# Altium PCB esp32-s3_poly.PcbDoc
Units mil, origin at the board's own origin, x right, y up, seen from the top; angles counter-clockwise.
Board outline 1000 x 2460.63 mil, 4 copper layers (Top Layer, Layer 1, Layer 2, Bottom Layer), stack 23.756 mil thick; 54 components, 58 nets, 223 pads, 233 vias.
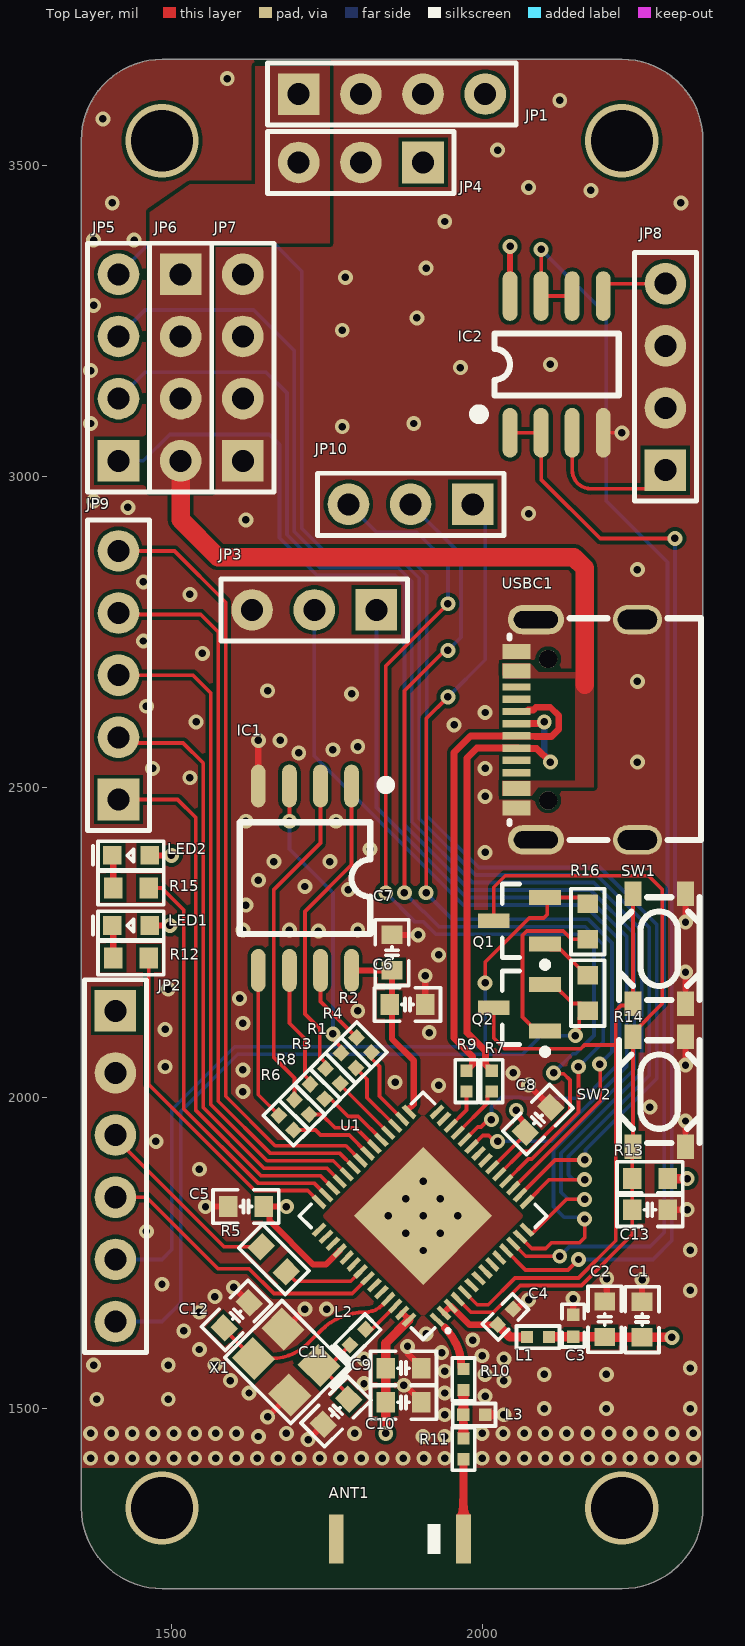
[diagram p0: Top Layer view]
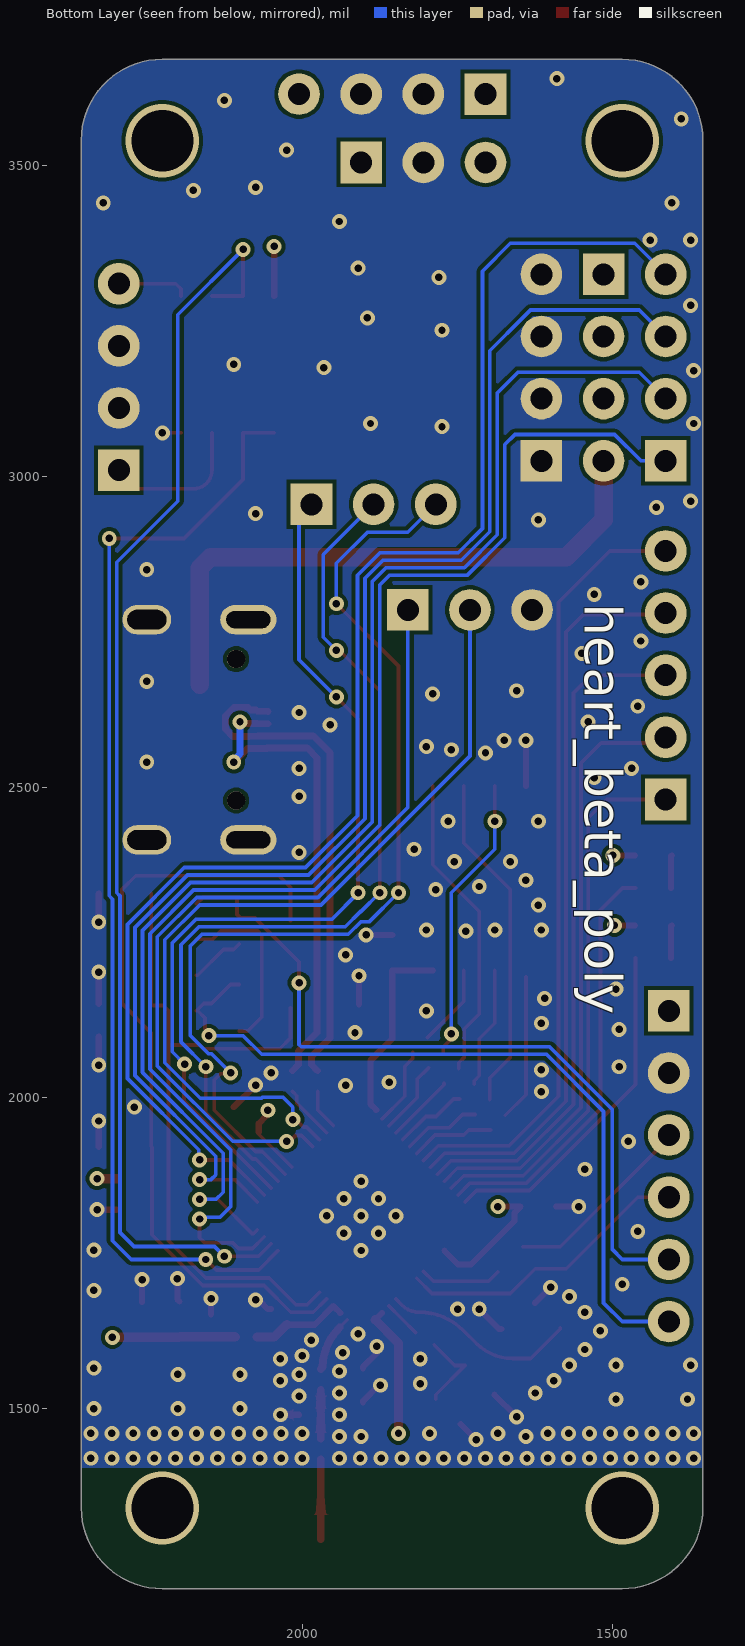
[diagram p1: Bottom Layer view, seen from below]
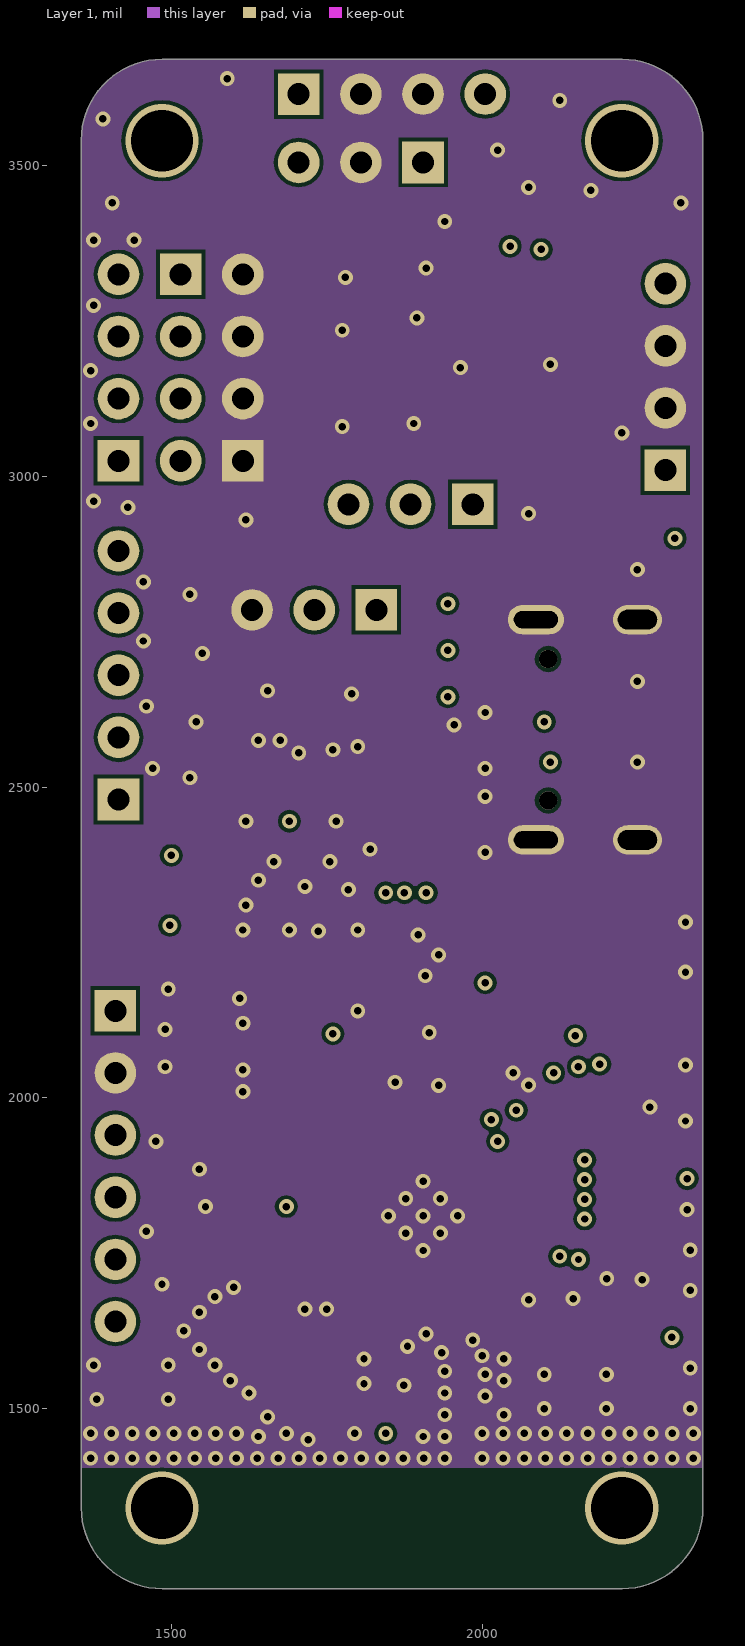
[diagram p2: Layer 1]
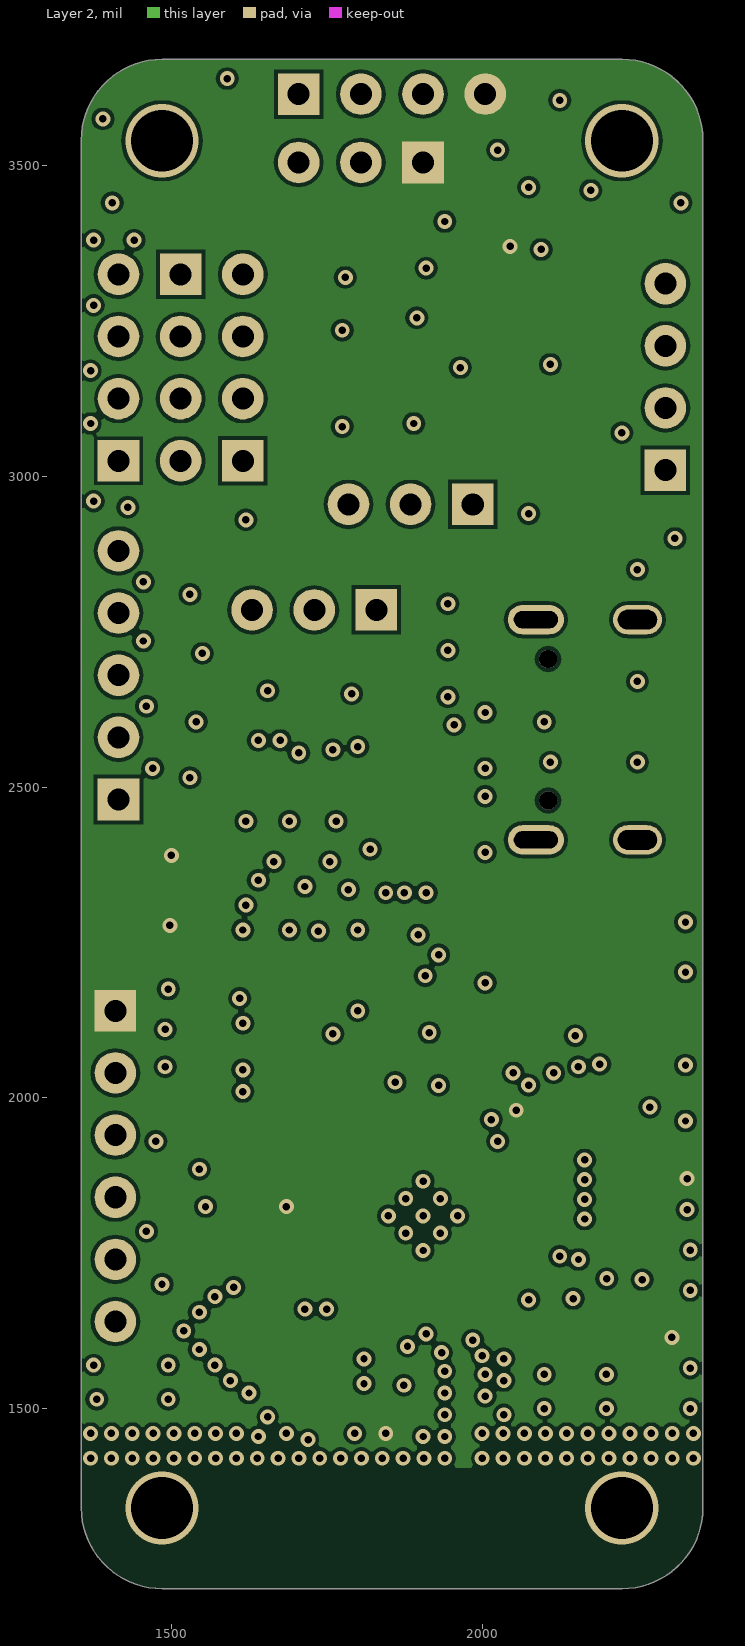
[diagram p3: Layer 2]

## Layer stack, top to bottom
Top Solder: solder mask 0.4, Solder Resist, Dk 3.5
Top Layer: signal copper 1.4
Dielectric 2: prepreg 2.8, PP-006, Dk 4.1
Layer 1: signal copper 1.378
Dielectric 1: dielectric 12.6, FR-4, Dk 4.8
Layer 2: signal copper 1.378
Dielectric 3: prepreg 2.8, PP-006, Dk 4.1
Bottom Layer: signal copper 1.4
Bottom Solder: solder mask 0.4, Solder Resist, Dk 3.5

## Board outline
1355.25,1340.17 ccw(c1485.17,1340.17) 1485.17,1210.25 2225.33,1210.25 ccw(c2225.33,1340.17) 2355.25,1340.17 2355.25,3540.96 ccw(c2225.33,3540.96) 2225.33,3670.88 1485.17,3670.88 ccw(c1485.17,3540.96) 1355.25,3540.96

## Design rules (kind name [scope] priority, off if disabled: settings)
AcuteAngle [All] p1: minimum=4.50000000000000E+0001 checktracksonly=FALSE
BoardOutlineClearance [All] p1: gap=0 ignorepadtopadclearanceinfootprint=FALSE
Clearance [All] p1: gap=6 ignorepadtopadclearanceinfootprint=TRUE
DiffPairsRouting [All] p1: maxlimit=10 minlimit=6 mostfreqgap=10 toplayer_minwidth=6 toplayer_maxwidth=15 toplayer_prefwidth=10 midlayer1_minwidth=6 midlayer1_maxwidth=15 midlayer1_prefwidth=10 midlayer2_minwidth=6 midlayer2_maxwidth=15 midlayer2_prefwidth=10 bottomlayer_minwidth=6 bottomlayer_maxwidth=15 bottomlayer_prefwidth=10 maxuncoupledlength=500
Length [All] p1: maxlimit=100000 minlimit=0
MatchedLengths DiffPair_MatchedLengths [InDifferentialPair ('D')] p1: tolerance=5 checknetsindiffpair=FALSE checkdiffpairvsdiffpair=TRUE checkxsignals=TRUE checkothers=TRUE
MinimumAnnularRing [All] p1: minimumring=4
MinimumSolderMaskSliver [All] p1: minsoldermaskwidth=3.2
ParallelSegment [All] p1: limit=10000 gap=10
PlaneClearance [All] p1: clearance=10
PlaneConnect [All] p1: planeconnectstyle=Direct reliefexpansion=20 reliefentries=4 reliefconductorwidth=10 reliefairgap=10
PolygonConnect [All] p1: connectstyle=Direct reliefconductorwidth=10 reliefentries=4 polygonreliefangle="90 Angle" airgapwidth=10
RoutingVias [All] p1: holewidth=12 width=20 viastyle="Through Hole" minholewidth=6 minwidth=10 maxholewidth=100 maxwidth=100
SilkToSilkClearance [All] p1: silktosilkclearance=0
SilkToSolderMaskClearance [IsPad] p1: minsilkscreentomaskgap=0 clearancetoexposedcopper=TRUE
SolderMaskExpansion [All] p1: expansion=0 istentingtop=FALSE
StubLength [All] p1: limit=1000
UnRoutedNet [All] p1: checkbadconnections=TRUE
ViasUnderSMD [All] p1: allowed=TRUE
Width POWER [InNetClass('PWR')] p1: maxlimit=200 minlimit=10 preferedwidth=30
Width singal [All] p2: maxlimit=32 minlimit=4 preferedwidth=10
23 further rules are at their usual default settings.

## Classes and differential pairs
component class esp32-s3: ANT1 C1 C2 C3 C4 C5 C6 C7 C8 C9 C10 C11 C12 C13 IC1 JP1 JP2 L1 L2 L3 LED1 LED2 Q1 Q2 R1 R2 R3 R4 R5 R6 R7 R8 R9 R10 R11 R12 R13 R14 R15 R16 SW1 SW2 U1 USBC1 X1
component class connector: IC2 JP3 JP4 JP5 JP6 JP7 JP8 JP9 JP10
differential pair D: +D_P -D_N

## Components (designator, comment, footprint, x,y, rotation, side; value= is the part's Value field where it differs from the comment)
ANT1 "CrossAir CA-C03" "crossair ca-co3" 1765.28,1290 r0 top
C1 "10uf" C0603_L 2257.52,1643.13 r270 top
C2 "1uf" C0603_L 2197.27,1643.6 r270 top
C3 "100nf" C0402_L 2146.53,1633.4 r270 top
C4 "100nf" C0402_L 2037.53,1647.53 r225 top
C5 "100nf" C0603_L 1620,1825 r0 top
C6 "1uf" C0603_L 1880,2150 r180 top
C7 "100nf" C0603_L 1855,2233.54 r270 top
C8 "100nf" C0603_L 2090,1965 r225 top
C9 "1uf" C0603_L 1873.54,1565 r180 top
C10 "10nf" C0603_L 1873.54,1510 r180 top
C11 "24pf" C0603_L 1765,1495 r45 top
C12 "24pf" C0603_L 1605,1650 r225 top
C13 "1uf" C0603_L 2270,1820 r180 top
IC1 "W25Q64" SOP8W_L 1715,2353.35 r270 top
IC2 "LM358" SOP8_N 2120,3180 r90 top
JP1 "HDR-1X4" HDR2.54-LI-4P 1855,3615 r0 top
JP2 "HDR-1X6" HDR2.54-LI-6P 1410,1890 r270 top
JP3 "HDR-1X3" HDR2.54-LI-3P 1730,2785 r180 top
JP4 "HDR-1X3" HDR2.54-LI-3P 1805,3505 r180 top
JP5 "HDR-1X4" HDR2.54-LI-4P 1415,3175 r90 top
JP6 "HDR-1X4" HDR2.54-LI-4P 1515,3175 r270 top
JP7 "HDR-1X4" HDR2.54-LI-4P 1615,3175 r90 top
JP8 "HDR-1X4" HDR2.54-LI-4P 2295,3160 r90 top
JP9 "HDR-1X5" HDR2.54-LI-5P 1415,2680 r90 top
JP10 "HDR-1X3" HDR2.54-LI-3P 1885,2955 r180 top
L1 "2nh" L0402 2090,1615 r180 top
L2 "24nh" L0402 1800,1615 r45 top
L3 "3nh" L0402 1987.24,1490.1 r180 top
LED1 "红色" LED0603_R 1435,2277.33 r180 top
LED2 "红色" LED0603_R 1435,2390 r180 top
Q1 "SS8050" SOT23-3N 2060,2285 r90 top
Q2 "SS8050" SOT23-3N 2060,2145 r90 top
R1 "0R" R0402_L 1760,2035 r135 top
R2 "0R" R0402_L 1810,2085 r315 top
R3 "0R" R0402_L 1735,2010 r135 top
R4 "0R" R0402_L 1785,2060 r315 top
R5 "499R" R0603_L 1665,1740 r315 top
R6 "0R" R0402_L 1685,1960 r135 top
R7 "0R" R0402_L 2015.44,2026.76 r270 top
R8 "0R" R0402_L 1710,1985 r135 top
R9 "0R" R0402_L 1975,2026.73 r270 top
R10 "0R" R0402_L 1970,1546.73 r270 top
R11 "0R" R0402_L 1970,1435 r270 top
R12 "470R" R0603_L 1435,2225 r180 top
R13 "10K" R0603_L 2270,1870 r180 top
R14 "10K" R0603_L 2170,2168.54 r270 top
R15 "470R" R0603_L 1435,2337.67 r180 top
R16 "10K" R0603_L 2170,2283.54 r90 top
SW1 "3*4*2.5" SW-SMD-4.2x3.2_4P 2285,2240 r90 top
SW2 "3*4*2.5" SW-SMD-4.2x3.2_4P 2285,2010 r90 top
U1 "ESP32-S3" "QFN56 7x7" 1905,1810.01 r135 top
USBC1 "TYPE-C 2.0 -16P" USB-C-SMD_16P 2152.55,2592.17 r270 top
X1 "40Mhz" XTAL-3225-4P 1685,1575 r135 top

## Footprints (in the part's own frame and the unit in brackets; to place one, negate y for a bottom-side part, rotate by r counter-clockwise, add the part's x,y. Pads: shape width x height; smd on the part's side, far side on the other; paste and mask are expansions set on the pad)
C0402_L [mm] "贴片MLCC电容"
  rect 0.5x0.5 smd: 1(-0.45,0) 2(0.45,0)
  silkscreen extent -0.87,-0.46 0.88,0.46, body extent -0.5,-0.25 0.5,0.25, height 0.5
C0603_L [mm] "贴片MLCC电容"
  rect 0.75x0.85 smd: 1(-0.725,0) 2(0.725,0)
  silkscreen extent -1.35,-0.69 1.35,0.69, body extent -0.8,-0.4 0.8,0.4, height 0.8
"crossair ca-co3" [mm] "wifi天线"
  rect 0.6x2 smd: 1(5.2,0) 2(0,0)
  silkscreen extent 3.74,-0.6 4.25,0.6
HDR2.54-LI-3P [mm] "排针，3脚                        联系卖家 免费查找封装"
  rect 1.7x1.7 hole 0.9: 1(-2.54,0)
  round 1.7 hole 0.9: 2(0,0) 3(2.54,0)
  silkscreen extent -3.81,-1.27 3.81,1.27, body extent -3.81,-1.27 3.81,1.27, height 2.54
HDR2.54-LI-4P [mm] "排针，4脚"
  rect 1.7x1.7 hole 0.9: 1(-3.81,0)
  round 1.7 hole 0.9: 2(-1.27,0) 3(1.27,0) 4(3.81,0)
  silkscreen extent -5.08,-1.27 5.08,1.27, body extent -5.08,-1.27 5.08,1.27, height 2.54
HDR2.54-LI-5P [mm] "排针，5脚"
  rect 1.7x1.7 hole 0.9: 1(-5.08,0)
  round 1.7 hole 0.9: 2(-2.54,0) 3(0,0) 4(2.54,0) 5(5.08,0)
  silkscreen extent -6.35,-1.27 6.35,1.27, body extent -6.35,-1.27 6.35,1.27, height 2.54
HDR2.54-LI-6P [mm] "排针，6脚                        联系卖家 免费查找封装"
  rect 1.7x1.7 hole 0.9: 1(-6.35,0)
  round 1.7 hole 0.9: 2(-3.81,0) 3(-1.27,0) 4(1.27,0) 5(3.81,0) 6(6.35,0)
  silkscreen extent -7.62,-1.27 7.62,1.27, body extent -7.62,-1.27 7.62,1.27, height 2.54
L0402 [mm] "0402贴片叠层电感"
  rect 0.5x0.5 smd: 1(-0.45,0) 2(0.45,0)
  silkscreen extent -0.87,-0.46 0.88,0.46, body extent -0.51,-0.26 0.51,0.26, height 0.52
LED0603_R [mil] "红色0603LED"
  rect 30x30 smd: 1(-30,0) 2(30,0)
  silkscreen extent -53,-23 61,23, body extent -31,-16 32,16, height 18
"QFN56 7x7" [mm] "56脚 QFN65 7x7"
  rect 0.665x0.2 smd: 1(-3.408,2.6) 2(-3.408,2.2) 3(-3.408,1.8) 4(-3.408,1.4) 5(-3.408,1) 6(-3.408,0.6) 7(-3.408,0.2) 8(-3.408,-0.2) 9(-3.408,-0.6) 10(-3.408,-1) 11(-3.408,-1.4) 12(-3.408,-1.8) 13(-3.408,-2.2) 14(-3.408,-2.6) 29(3.407,-2.6) 30(3.407,-2.2) 31(3.407,-1.8) 32(3.407,-1.4) 33(3.407,-1) 34(3.407,-0.6) 35(3.407,-0.2) 36(3.407,0.2) 37(3.407,0.6) 38(3.407,1) 39(3.407,1.4) 40(3.407,1.8) 41(3.407,2.2) 42(3.407,2.6)
  rect 0.2x0.665 smd: 15(-2.6,-3.407) 16(-2.2,-3.407) 17(-1.8,-3.407) 18(-1.4,-3.407) 19(-1,-3.407) 20(-0.6,-3.407) 21(-0.2,-3.407) 22(0.2,-3.407) 23(0.6,-3.407) 24(1,-3.407) 25(1.4,-3.407) 26(1.8,-3.407) 27(2.2,-3.407) 28(2.6,-3.407) 43(2.6,3.408) 44(2.2,3.408) 45(1.8,3.408) 46(1.4,3.408) 47(1,3.408) 48(0.6,3.408) 49(0.2,3.408) 50(-0.2,3.408) 51(-0.6,3.408) 52(-1,3.408) 53(-1.4,3.408) 54(-1.8,3.408) 55(-2.2,3.408) 56(-2.6,3.408)
  rect 4x4 smd: 57(0,0)
  silkscreen extent -4.11,-3.58 3.58,3.58, body extent -3.51,-3.51 3.51,3.51, height 0.9
R0402_L [mm] "1/16W贴片电阻"
  rect 0.5x0.5 smd: 1(-0.425,0) 2(0.425,0)
  silkscreen extent -0.88,-0.46 0.87,0.46, body extent -0.5,-0.25 0.5,0.25, height 0.3
R0603_L [mm] "1/10W贴片电阻"
  rect 0.75x0.85 smd: 1(-0.725,0) 2(0.725,0)
  silkscreen extent -1.35,-0.69 1.35,0.69, body extent -0.8,-0.4 0.8,0.4, height 0.4
SOP8_N [mil] "5*6*1.8mm（长宽高）"
  oval 80x24 smd: 1(-110,75) 2(-110,25) 3(-110,-25) 4(-110,-75) 5(110,-75) 6(110,-25) 7(110,25) 8(110,75)
  silkscreen extent -86,-100 50,131, body extent -118,-98 118,98, height 75
SOP8W_L [mm] "SPI_FLASH 5.3*8.3*1.8mm（长宽高）联系卖家 免费查找封装"
  oval 1.75x0.6 smd: 1(-3.768,1.905) 2(-3.768,0.635) 3(-3.768,-0.635) 4(-3.768,-1.905) 5(3.768,-1.905) 6(3.768,-0.635) 7(3.768,0.635) 8(3.768,1.905)
  silkscreen extent -3.94,-2.67 2.29,3.43, body extent -3.94,-2.64 3.94,2.64, height 1.9
SOT23-3N [mm] "SOT23, 3-Leads, Body 2.9x1.3mm, Pitch 0.95mm, Lead Span 2.4mm, IPC Medium Density  联系卖家  获取最新版本"
  rect 0.6x1.3 smd: 1(-0.95,-1.05) 2(0.95,-1.05) 3(0,1.05)
  silkscreen extent -1.92,-1.18 1.5,0.7, body extent -1.5,-1.2 1.5,1.2, height 1.05
SW-SMD-4.2x3.2_4P [mil]
  rect 39.4x27.6 smd mask+2: 1(-88.6,42.3) 2(-88.6,-42.3) 3(88.6,-42.3) 4(88.6,42.3)
  silkscreen extent -83,-65 83,65, body extent -92,-65 92,65, height 99
USB-C-SMD_16P [mm] "封装库来自淘宝ID:黄晶宝石"
  oval 1.2x2 hole 0.8 slot 1.6 at 90 deg: 0(-4.5,2.475) 0(4.5,2.475)
  oval 1.2x2.3 hole 0.7 slot 1.8 at 90 deg: 0(-4.5,-1.675) 0(4.5,-1.675)
  rect 0.3x1.15 smd: A1(3.35,-2.473) A4(2.55,-2.471) A5(1.25,-2.475) A6(0.25,-2.475) A7(-0.25,-2.473) A9(-2.55,-2.475) A12(-3.35,-2.475) B1(-3.05,-2.475) B4(-2.25,-2.475) B5(-1.75,-2.475) B6(-0.75,-2.475) B7(0.75,-2.473) B9(2.25,-2.471) B12(3.05,-2.473)
  rect 0.3x1.148 smd: A8(1.75,-2.475) B8(-1.25,-2.475)
  round 0.75 hole 0.75 unplated: ""(-2.89,-1.175) ""(2.89,-1.175)
  silkscreen extent -4.56,-2.75 4.5,5.08, body extent -4.45,-2.87 4.49,5.03, height 3.25
XTAL-3225-4P [mm] "3.2*2.5*0.7mm(长宽高)                             淘宝ID:黄晶宝石"
  rect 1.3x1.2 smd: 1(-1.05,-0.85) 2(1.05,-0.85) 3(1.05,0.85) 4(-1.05,0.85)
  silkscreen extent -2.03,-1.75 1.9,1.65, body extent -1.6,-1.25 1.6,1.25, height 0.7

## Part data
ANT1: "2450±50MHz 4.3DBi 50欧 功率3W", Add into BOM=yes, Convert to PCB=yes, Device="CrossAir CA-C03", Name="CrossAir CA-C03", Symbol="CrossAir CA-C03"
C1 C2 C3 C4 C5 C6 C7 C8 C9 C10 C13: library part C, "贴片电容/MLCC电容", BOM名称=无极性贴片电容, 联系下单店铺卖家 免费帮你查找封装="联系下单店铺卖家 免费技术指导"
C11 C12: library part C, "贴片电容/MLCC电容 C1654", BOM名称=无极性贴片电容, 联系下单店铺卖家 免费帮你查找封装="联系下单店铺卖家 免费技术指导"
IC1: library part W25Q, "SPI Flash C83140", BOM名称=外置Flash, 封装库来自淘宝卖家：黄晶宝石="其他店铺购入均为盗版封装库，无更新权益，请立即申请退款，联系卖家：黄晶宝石 获取现金奖励200~5000元"
IC2: "双路运放", BOM名称=双路运放, 封装库来自淘宝卖家：黄晶宝石=其他店铺购入均为赃物，无售后更新权益，请立即申请退款，退款后现金奖励200~1000元
JP1 JP5 JP6 JP7 JP8: library part "Header 4", "4P接插件", BOM名称=4P接插件, 封装库来自淘宝卖家ID：黄晶宝石=其他店铺购入均为盗版封装库，请立即申请退款，本店现金奖励50~200元, 联系卖家，免费查找封装=唯一出售店铺网址https://shop463601444.taobao.com
JP2: library part "Header 6", "6P接插件", BOM名称=6P接插件, 封装库来自淘宝卖家ID：黄晶宝石=其他店铺购入均为盗版封装库，请立即申请退款，本店现金奖励50~200元, 联系卖家，免费查找封装=唯一出售店铺网址https://shop463601444.taobao.com
JP3 JP4 JP10: library part "Header 3", "3P接插件", BOM名称=3P接插件, 封装库来自淘宝卖家ID：黄晶宝石=其他店铺购入均为盗版封装库，请立即申请退款，本店现金奖励50~200元, 联系卖家，免费查找封装=唯一出售店铺网址https://shop463601444.taobao.com
JP9: library part "Header 5", "5P接插件", BOM名称=5P接插件, 封装库来自淘宝卖家ID：黄晶宝石=其他店铺购入均为盗版封装库，请立即申请退款，本店现金奖励50~200元, 联系卖家，免费查找封装=唯一出售店铺网址https://shop463601444.taobao.com
L1: library part L, "贴片小功率电感 C18216", BOM名称=小功率贴片电感, 联系下单店铺卖家 免费帮你查找封装="联系下单店铺卖家 免费技术指导"
L2: library part L, "贴片小功率电感 C74301", BOM名称=小功率贴片电感, 联系下单店铺卖家 免费帮你查找封装="联系下单店铺卖家 免费技术指导"
L3: library part L, "贴片小功率电感", BOM名称=小功率贴片电感, 联系下单店铺卖家 免费帮你查找封装="联系下单店铺卖家 免费技术指导"
LED1 LED2: library part LED, "贴片LED", BOM名称=贴片LED, 封装库来自淘宝卖家：黄晶宝石=其他店铺购入均为盗版封装库，无更新权益，请立即申请退款，本店现金奖励200~1000元
Q1 Q2: library part 8050-SMD, "高频放大-NPN型", BOM名称=高频放大-NPN型, 卖家免费技术支持，联系售后=唯一出售店铺网址https://shop463601444.taobao.com, 卖家免费查找封装，联系售后=唯一出售店铺网址https://shop463601444.taobao.com, 封装库来自淘宝卖家 ID：黄晶宝石=其他店铺购入均为假冒，请立即申请退款，本店奖励2~5元现金, 属性="40V 1.5A 1W 100MHZ"
R1 R2 R3 R4 R5 R6 R7 R8 R9 R10 R11 R12 R13 R14 R15 R16: library part R, "贴片电阻", BOM名称=贴片电阻, 联系下单店铺卖家 免费帮你查找封装="联系下单店铺卖家 免费技术指导"
SW1 SW2: library part "SW SMD-3*4*2.5", "贴片4脚轻触开关 C2690012", 联系下单店铺卖家 免费技术支持="联系下单店铺卖家 免费帮你查找封装"
U1: "2.4 GHz Wi­Fi + 低功耗蓝牙 SoC"
USBC1: library part USB2.0_Type-C_16Pin, "USB2.0_Type-C_16Pin母座", 当前库版本V2024.2.3 @淘宝卖家:黄晶宝石=最新版本发布https://item.taobao.com/item.htm?id=566775463719
X1: library part XTAL-4P, "4脚无源晶振(谐振器）C5203551", BOM名称=4脚无源晶振(谐振器）, 联系下单店铺卖家 免费帮你查找封装="联系下单店铺卖家 免费技术指导"

## Via types
v1: diameter 24, hole 12, Top Layer to Bottom Layer, tented both sides, 223 vias
v2: diameter 24, hole 12, Top Layer to Bottom Layer, 6 vias
v3: diameter 118.11, hole 99.61, Top Layer to Bottom Layer, 4 vias

## Nets (pads, with @x,y where several pads share a name; then routed paths per layer and width w, separated by ;. In a path a pad name is that pad's centre, name@x,y a point inside that pad or via, vN(x,y) a via of type N, cw(c..) or ccw(c..) an arc to the next point about the centre after c; other vN are vias at no path point)
A5: IC2.1 IC2.2 U1.11 | length 1810.5
  Top Layer w6: U1.11 2069.95,1723 2138.3,1723 v1(2155.15,1739.85) ; IC2.1 IC2.2 2095,2995 2190,2900 v1(2310.37,2900)
  Bottom Layer w6: v1(2155.15,1739.85) 2274.85,1739.85 2305,1770 2305,2319.63 2310.37,2325 v1(2310.37,2900)
A5_IN: IC2.3 JP8.1 | length 244.2
  Top Layer w6: IC2.3 2145,3010 ccw(c2175,3010) 2175,2980 2265,2980 ccw(c2265,3010) JP8.1
A6: IC2.6 IC2.7 U1.12 | length 2060.5
  Top Layer w6: U1.12 2070.22,1745 v1(2125,1745) ; v1(2095,3365) IC2.7 IC2.6
  Bottom Layer w6: v1(2095,3365) 2200,3260 2200,2960 2298.37,2861.63 2298.37,2329.97 2293,2324.6 2293,1783.21 2270.64,1760.85 2140.85,1760.85 v1(2125,1745)
A6_IN: IC2.5 JP8.4 | length 115.1
  Top Layer w6: IC2.5 2195,3301.69 2203.31,3310 JP8.4
BOOT: Q2.3 SW1.1 SW1.4 U1.5 | length 1128.3
  Top Layer w6: U1.5 1992.32,1667 2010,1667 2053,1710 2155,1710 2215,1770 2215,2085 ; Q2.3 2018.66,2096.34 2036,2079 2158.7,2079 2164.7,2085 2215,2085 ; SW1.4 SW1.1 2239.71,2148.41 2223.41,2148.41 2215,2140 2215,2085
D_N: R7.1 USBC1.A7 USBC1.B7 | length 787.3
  Top Layer w10.92: R7.1 2005.68,2053.25 2005.68,2075.07 1975.92,2104.82 1975.92,2546.99 1991.56,2562.63 USBC1.B7@2057.5,2562.63 ; USBC1.B7 2055.64,2562.18 2087.82,2562.18 v1(2110,2540) ; USBC1.A7 2071.91,2602.01 2072.36,2602.45 2093.91,2602.45 2096.46,2605 v1(2100,2605)
  Bottom Layer w10.92: v1(2100,2605) 2100,2553.54 2110,2543.54 v1(2110,2540)
D_P: R9.1 USBC1.A6 USBC1.B6 | length 811.6
  Top Layer w10.92: R9.1 1984.76,2053.22 1984.76,2066.4 1955,2096.16 1955,2555.66 1981.67,2582.32 2071.85,2582.32 2072.3,2581.88 2084.9,2581.88 2085.25,2581.53 2111.75,2581.53 2123.46,2593.24 2123.46,2614.72 2109.72,2628.46 2086.91,2628.46 2082.46,2624.02 2074.17,2624.02 2072.3,2622.14 2055.56,2622.14 USBC1.B6
DTR: JP2.6 Q2.2 R14.2 | length 1246.6
  Top Layer w6: Q2.2 2115.12,2182.4 2145.76,2151.76 2158.24,2151.76 R14.2 2168.03,2140 2156.27,2128.24 2156.27,2111.14 2150,2104.87 v1(2150,2100)
  Bottom Layer w6: JP2.6 1485,1640 1515,1670 1515,1978.03 1606.97,2070 2065,2070 2095,2100 v1(2150,2100)
GND: C1.1 C2.1 C3.1 C4.1 C5.1 C6.1 C7.1 C8.1 C9.1 C10.1 C11.1 C12.1 C13.1 IC1.4 IC2.4 JP1.2 JP1.3 JP2.2 JP3.3 JP4.2 JP7.1 JP7.2 JP7.3 JP7.4 JP8.2 JP8.3 L3.1 SW1.2 SW1.3 SW2.2 SW2.3 U1.57 USBC1.0 USBC1.A1 USBC1.A12 USBC1.B1 USBC1.B12 X1.2 X1.4 | length 908.6
  Top Layer w6: IC2.4 v1(2225,3070)
  Top Layer w10: v1(1555,1825) C5.1 ; v1(1600.37,1695) C12.1 ; IC1.4 v1(1640,2575) ; v1(1655,1486.54) X1.4 ; X1.2 1682.89,1627.89 v1(1715,1660) ; v1(1720,1450) C11.1 ; C7.1 v1(1897.09,2262.09) ; v1(1874.19,1537.5) 1876.56,1537.5 1902.09,1511.97 C10.1 ; v1(1880,1600) 1880,1589.06 1902.09,1566.97 C9.1 ; C6.1 v1(1908.54,2196.46) ; L3.1 2005,1490.05 v1(2035,1490) v1(2035,1490) ; C4.1 2055.3,1660.06 2070.24,1675 v1(2075,1675) ; v1(2075,2020.37) C8.1 ; C3.1 v1(2146.53,1677) ; C2.1 2200.61,1675.47 v1(2200.61,1708.94) ; C1.1 v1(2257.52,1707.52) ; C13.1 v1(2330,1820) ; SW2.2 v1(2327.3,1962.7) ; v1(2327.3,2052.7) SW2.3 ; SW1.2 v1(2327.3,2202.3) ; v1(2327.3,2282.7) SW1.3
  other v1: 1370,1420 1403.53,1420 1437.06,1420 1470.59,1420 1504.12,1420 1537.65,1420 1571.18,1420 1604.71,1420 1638.24,1420 1671.76,1420 1705.29,1420 1738.82,1420 1772.35,1420 1805.88,1420 1839.41,1420 1872.94,1420 1906.47,1420 1940,1420 2000,1420 2034,1420 2068,1420 2102,1420 2136,1420 2170,1420 2204,1420 2238,1420 2272,1420 2306,1420 2340,1420 1640,1455 1905,1455 1940,1455 1370,1460 1403.53,1460 1437.06,1460 1470.59,1460 1504.12,1460 1537.65,1460 1571.18,1460 1604.71,1460 1685,1460 1795,1460 2000,1460 2034,1460 2068,1460 2102,1460 2136,1460 2170,1460 2204,1460 2238,1460 2272,1460 2306,1460 2340,1460 1940,1490 2100,1500 2200,1500 2335,1500 1380,1515 1495,1515 2005,1520 1625,1525 1940,1525 1810,1540 1595,1545 2035,1545 2005,1555 2100,1555 2200,1555 1940,1560 2335,1565 1375,1570 1495,1570 1570,1570 1810,1580 2035,1580 2000,1585 1935,1590 1545,1595 1985,1610 1910,1620 1520,1625 1545,1655 1750,1660 1570,1680 2335,1690 1485,1700 1905,1754.34 2335,1755 1877.17,1782.17 1932.83,1782.17 1460,1785 1849.33,1810.01 1905,1810.01 1960.68,1810.01 1877.17,1837.85 1932.81,1837.85 1905,1865.68 1545,1885 1475,1930 2270,1985 1615,2010 1930,2020 1860,2025 2050,2040 1615,2045 1490,2050 1915,2105 1490,2110 1615,2120 1800,2140 1610,2160 1495,2175 1736.52,2268.32 1615,2270 1690,2270 1800,2270 1620,2310 1785,2335 1715,2340 1640,2350 1665,2380 1755,2380 1820,2400 1620,2445 1765,2445 1530,2515 1470,2530 2250,2540 1705,2555 1760,2560 1800,2565 1675,2575 1540,2605 1460,2630 1790,2650 1655,2655 2250,2670 1550,2715 1455,2735 1530,2810 1455,2830 2250,2850 1620,2930 2075,2940 1430,2950 1375,2960 1775,3080 1370,3085 1890,3085 1370,3170 1965,3175 2110,3180 1775,3235 1895,3255 1375,3275 1780,3320 1910,3335 1375,3380 1440,3380 1940,3410 1405,3440 2320,3440 2175,3460 2075,3465 2025,3525 1390,3575 2125,3605 1590,3640
  other v2: 1930,2230 2005,2395 2005,2485 2005,2530 1955,2600 2005,2620
IO33: JP9.3 U1.38 | length 1087.8
  Top Layer w6: JP9.3 1535,2680 1563.47,2651.53 1563.47,1989.41 1654.15,1898.73 1760.59,1898.73 U1.38
IO34: JP9.2 U1.39 | length 976.5
  Top Layer w6: JP9.2 1423.95,2571.05 1518.95,2571.05 1551.47,2538.53 1551.47,1984.44 1649.18,1886.73 1750.32,1886.73 U1.39
IO35: JP9.1 U1.40 | length 880
  Top Layer w6: JP9.1 1510,2480 1539.47,2450.53 1539.47,1979.47 1644.21,1874.73 1740.05,1874.73 U1.40
IO47: JP9.4 U1.37 | length 1190.2
  Top Layer w6: JP9.4 1417.46,2777.54 1547.46,2777.54 1575.47,2749.53 1575.47,1994.38 1658.85,1911 1770.59,1911 U1.37
IO48: JP9.5 U1.36 | length 1261.5
  Top Layer w6: JP9.5 1505,2880 1587.47,2797.53 1587.47,2002.53 1667,1923 1780.86,1923 U1.36
LED1: R12.1 U1.42 | length 556
  Top Layer w6: R12.1 1463.55,2021.45 1634.27,1850.73 1719.51,1850.73 U1.42
LED2: R15.1 U1.41 | length 677.7
  Top Layer w6: R15.1 1484.68,2337.67 1520,2302.35 1520,1981.97 1639.24,1862.73 1729.78,1862.73 U1.41
NetANT1_1: ANT1.1 R11.2 | length 128.3
  Top Layer w12.69: ANT1.1 R11.2
NetC11_2: C11.2 L2.1 X1.1 | length 137.1
  Top Layer w6: C11.2 1785.18,1522.14 X1.1 1754.43,1569.43 L2.1
NetIC1_1: IC1.1 R1.2 | length 499.7
  Top Layer w6: R1.2 1748.17,2056.51 1739,2065.68 1739,2111 1715,2135 1715,2300 1790,2375 IC1.1
NetIC1_2: IC1.2 R8.2 | length 549.7
  Top Layer w6: R8.2 1698.17,2031.83 1665,2065 1665,2335 1740,2410 IC1.2
NetIC1_3: IC1.3 R4.1 | length 464.3
  Top Layer w6: v1(1690,2445) IC1.3 ; v1(1760,2103) 1763.44,2099.56 1763.44,2091.23 1773.17,2081.51 R4.1
  Bottom Layer w6: v1(1690,2445) 1690,2400 1760,2330 v1(1760,2103)
NetIC1_5: IC1.5 R6.2 | length 236.9
  Top Layer w6: IC1.5@1640,2195 1640,2005 R6.2
NetIC1_6: IC1.6 R3.2 | length 196.9
  Top Layer w6: IC1.6 1690,2120 1715,2095 1715,2035.34 1723.17,2027.17 R3.2
NetIC1_7: IC1.7 R2.1 | length 132.3
  Top Layer w6: IC1.7 1740,2155 R2.1
NetL3_2: L3.2 R10.2 R11.1 | length 78.5
  Top Layer w12.69: R11.1 1970,1488.94 ccw(c1968.37,1488.94) L3.2 ccw(c1968.37,1491.25) 1970,1491.25 R10.2
NetLED1_2: LED1.2 R12.2 | length 52.9
  Top Layer w10: LED1.2 1406.46,2275.88 R12.2
NetLED2_2: LED2.2 R15.2 | length 52.9
  Top Layer w10: LED2.2 1406.46,2388.54 R15.2
NetQ1_1: Q1.1 R14.1 | length 89.6
  Top Layer w6: Q1.1 2110.15,2238.79 2126.33,2238.79 2168.03,2197.09 R14.1
NetQ2_1: Q2.1 R16.1 | length 290.4
  Top Layer w6: Q2.1 2087.56,2107.6 2065,2130.16 2065,2261.49 2071.92,2268.41 2130.66,2268.41 2144.07,2255 R16.1
NetR5_2: R5.2 U1.49 | length 132
  Top Layer w6: R5.2 1700,1705 1788.86,1705 U1.49
NetR7_2: R7.2 U1.25 | length 88.8
  Top Layer w6: U1.25 2008.59,1991.54 2008.59,2003.19 R7.2
NetR9_2: R9.2 U1.26 | length 65.5
  Top Layer w6: U1.26 1975,1980.22 R9.2
NetR10_1: R10.1 U1.1 | length 92.8
  Top Layer w6: U1.1 1934.62,1635.62 1940,1630.24
  Top Layer w12.69: 1940,1630.24 cw(c1874.4,1564.64) 1967.14,1566.96 R10.1
PWM0: JP5.1 U1.13 | length 2194.5
  Top Layer w6: U1.13 2080.01,1757.49 2102.49,1757.49 2112,1767 2157,1767 2165,1775 v1(2165,1805)
  Bottom Layer w6: JP5.1 1454.95,3025 1497.41,3067.46 1657.54,3067.46 1674,3051 1674,2901 1734,2841 1859,2841 1875,2825 1875,2439.09 1979.68,2334.41 2174.68,2334.41 2245,2264.09 2245,2045.91 2115,1915.91 2115,1825 2132.05,1807.95 2162.05,1807.95 v1(2165,1805)
PWM1: JP5.2 U1.14 | length 2228
  Top Layer w6: U1.14 2078.71,1781.05 2080.04,1781.05 2135.66,1836.67 v1(2165,1836.67)
  Bottom Layer w6: JP5.2 1457.46,3167.46 1652.54,3167.46 1686,3134 1686,2905.97 1738.97,2853 1865.03,2853 1887,2831.03 1887,2444.06 1984.65,2346.41 2179.65,2346.41 2257,2269.06 2257,2040.94 2127,1910.94 2127,1848.18 2138.51,1836.67 v1(2165,1836.67)
PWM2: JP5.3 U1.15 | length 2269
  Top Layer w6: U1.15 2108.09,1868.33 v1(2165,1868.33)
  Bottom Layer w6: JP5.3 1457.46,3267.46 1632.54,3267.46 1643.73,3256.27 1643.78,3256.27 1698,3202.05 1698,2910.94 1743.94,2865 1870,2865 1899,2836 1899,2449.03 1989.62,2358.41 2184.62,2358.41 2269,2274.03 2269,2035.97 2139,1905.97 2139,1876 2146.67,1868.33 v1(2165,1868.33)
PWM3: JP5.4 U1.16 | length 2364.2
  Top Layer w6: U1.16 2117.49,1900 v1(2165,1900)
  Bottom Layer w6: JP5.4 1465,3375 1665,3375 1710,3330 1710,2915.91 1748.91,2877 1874.97,2877 1911,2840.97 1911,2454 1994.59,2370.41 2189.59,2370.41 2281,2279 2281,2031 2166.35,1916.35 2166.35,1901.35 v1(2165,1900)
RESET: C13.2 Q1.3 R13.2 SW2.1 SW2.4 U1.4 | length 1258.5
  Top Layer w6: U1.4 1982.05,1655 2018.35,1655 2061.35,1698 2159.97,1698 2241.46,1779.49 C13.2 R13.2 2241.46,1920.16 SW2.1 SW2.4 2242.7,2104.5 2290,2151.8 2290,2335 2267.7,2357.3 2037.3,2357.3 2018.66,2338.66 Q1.3
RTS: JP2.5 Q1.2 R16.2 | length 1244.5
  Top Layer w6: v1(2005,2185) 2005,2218.46 2075.95,2289.41 2099.41,2289.41 2105,2295 2105,2318.74 Q1.2 2159.69,2322.4 R16.2
  Bottom Layer w6: JP2.5 1485,1740 1500.83,1755.83 1500.83,1980.83 1602,2082 2001.49,2082 2005,2085.51 v1@2005,2193.06
RX0: JP2.4 U1.50 | length 485.1
  Top Layer w6: JP2.4@1405,1840 1460,1840 1575,1725 1625,1725 1665,1685 1791.14,1685 U1.50
RX1: JP3.2 U1.24 | length 1359.5
  Top Layer w6: U1.24 1972.7,1932.7 1993.03,1953.03 1998.16,1953.03 2010.13,1965 v1(2015,1965)
  Bottom Layer w6: JP3.2 1730,2550.15 1969.74,2310.41 2164.74,2310.41 2221,2254.15 2221,2056.3 2164.06,1999.37 2065.33,1999.37 2063.7,2001 2031,2001 2015,1985 v1(2015,1965)
SPICLK: R3.1 U1.33 | length 118.3
  Top Layer w6: R3.1 1756.51,1998.17 1784.68,1970 1800.68,1970 U1.33
SPICS0: R1.1 U1.32 | length 111.3
  Top Layer w6: R1.1 1771.83,2021.12 U1.32
SPID: R6.1 U1.35 | length 134.5
  Top Layer w6: R6.1 1731.83,1948.17 1740,1940 1786.14,1940 U1.35
SPIHD: R2.2 U1.30 | length 127.6
  Top Layer w6: R2.2 1821.83,2063.49 1835,2050.32 1835,2002.49 U1.30
SPIQ: R8.1 U1.34 | length 126.4
  Top Layer w6: R8.1 1741.83,1973.17 1763,1952 1796.41,1952 U1.34
SPIWP: R4.2 U1.31 | length 119.5
  Top Layer w6: R4.2 1815,2030 1815,2000.22 U1.31
TOUCH1: JP10.1 U1.17 | length 1466.4
  Top Layer w6: v1(1910,2330) 1910,2610 v1(1945,2645) ; U1.17 2050.08,1854.75 2190,1994.67 2190,2053.25 v1(2189.12,2054.12)
  Bottom Layer w6: v1(1910,2330) 1910,2329.58 1952.49,2287.09 2171.09,2287.09 2209,2249.18 2209,2074 v1(2189.12,2054.12) ; v1(1945,2645) 2005,2705 2005,2935 JP10.1
TOUCH2: JP10.2 U1.18 | length 1504.1
  Top Layer w6: v1(1875,2330) 1875,2655 v1@1945,2725 ; U1.18 2074.49,1901.55 2079.91,1901.55 2155,1976.64 v1(2155,2050)
  Bottom Layer w6: v1(1875,2330) 1905.4,2299.6 1906.24,2299.6 1930.75,2275.09 2166.12,2275.09 2195,2246.21 2195,2090 v1(2155,2050) ; JP10.2 1966,2874 1966,2741 v1(1945,2720)
TOUCH3: JP10.3 U1.19 | length 1611.5
  Top Layer w6: v1(1845,2330) 1845,2695 v1(1945,2795) ; U1.19 2064.22,1913.55 2074.94,1913.55 2141.45,1980.06 2141.45,2028.82 2131.49,2038.79 2116.21,2038.79 v1(2115,2040)
  Bottom Layer w6: JP10.3 1830,2910 1895,2910 1945,2860 v1(1945,2795) ; v1(1845,2330) 1845.3,2330 1892.21,2283.09 1905.79,2283.09 1925.78,2263.09 2161.15,2263.09 2180,2244.24 2180,2100.3 2150.7,2071 2146,2071 v1(2115,2040)
TX0: JP2.3 R5.1 | length 314.3
  Top Layer w6: JP2.3@1405,1940 1584.82,1760.18 R5.1
TX1: JP3.1 U1.23 | length 1326.2
  Top Layer w6: U1.23 2001,1939.41 2010.72,1939.41 2020.13,1930 v1(2025,1930)
  Bottom Layer w6: JP3.1 1830,2467.12 1974.71,2322.41 2169.71,2322.41 2233,2259.12 2233,2051.33 2111.67,1930 v1(2025,1930)
VCC3_3: C1.2 C2.2 C3.2 C5.2 C8.2 C9.2 C10.2 IC2.8 JP1.4 JP2.1 JP4.1 L1.1 LED1.1 LED2.1 R13.1 U1.20 U1.46 U1.55 U1.56 | length 926.6
  Top Layer w6: U1.20 2069.82,1941.41 C8.2
  Top Layer w10: LED1.1 v1(1497.67,2277.33) ; LED2.1 v1(1500,2390) ; v1(1685,1825) C5.2 1658.13,1815.42 1658.13,1801.87 1728.36,1731.64 1748.69,1731.64 U1.46 ; U1.55 U1.56 ; IC2.8 v1(2045,3370) ; v1(2055,1980) 2057.68,1977.32 2057.68,1970.76 2069.82,1958.62 C8.2
  Top Layer w15: v1(1845,1460) C10.2 C9.2 1845,1605.24 U1.56 ; L1.1 2108.06,1615.34 2146.19,1615.34 C3.2 2146.85,1615.37 2196.96,1615.37 C2.2 2197.51,1614.82 2257.29,1614.82 C1.2 v1(2305.41,1614.59) ; R13.1 v1(2330,1870)
VCC5: JP1.1 JP4.3 JP6.1 JP6.2 JP6.3 JP6.4 USBC1.A4 USBC1.A9 USBC1.B4 USBC1.B9 | length 964.6
  Top Layer w30: JP6.4 1515,2930 1575,2870 2147.43,2870 2165,2852.43 2165,2665
VDD3P3: C4.2 L1.2 U1.2 U1.3 | length 159
  Top Layer w10: U1.2 U1.3 1979.78,1635 C4.2
  Top Layer w15: C4.2 2045,1615 L1.2
VDDSPI: C6.2 C7.2 IC1.8 U1.29 | length 307.8
  Top Layer w10: IC1.8 C7.2 1855,2145 1855,2095 1890,2060 1890,1989.76 U1.29@1880.75,1980.51
XTAL_N: C12.2 U1.53 X1.3 | length 315.8
  Top Layer w6: C12.2 1584.82,1627.86 X1.3 1661.02,1580.57 ccw(c1661.02,1663.98) 1720,1605 1740.71,1625.71 cw(c1811.42,1555) 1811.42,1655 ccw(c1811.42,1694.9) 1839.64,1666.69 U1.53
XTAL_P: L2.2 U1.54 | length 60.3
  Top Layer w6: L2.2@1817.53,1622.53 1840.46,1645.46 1840.68,1645.46 U1.54
pads on no net: ANT1.2 U1.6 U1.7 U1.8 U1.9 U1.10 U1.21 U1.22 U1.27 U1.28 U1.43 U1.44 U1.45 U1.47 U1.48 U1.51 U1.52 USBC1. USBC1.A5 USBC1.A8 USBC1.B5 USBC1.B8
copper on no net:
  other v3: 1485,1340 2225,1340 1485,3540 2225,3540

## Polygon pours and split planes (outlines as drawn)
GND on Top Layer "GND_TOP" (solid, remove dead copper, pour order 7): 1355.25,1340.17 ccw(c1485.17,1340.17) 1485.17,1210.25 2225.33,1210.25 ccw(c2225.33,1340.17) 2355.25,1340.17 2355.25,3540.96 ccw(c2225.33,3540.96) 2225.33,3670.88 1485.17,3670.88 ccw(c1485.17,3540.96) 1355.25,3540.96
VCC5 on Top Layer "NONET_L-01_P-001" (solid, pour order 4): 2032.57,2675.11 2032.67,2675 2150,2675 2150,2509.86 2032.75,2509.86 2032.75,2485.97 2079.91,2485.97 2090,2500 2180,2500 2180,2685 2091.13,2685 2077.13,2699 2032.75,2699
GND on Top Layer "NONET_L-01_P-001" (solid, remove dead copper, pour order 3): 2132.85,2388.01 2027.85,2388.01 2027.85,2478.01 2077.85,2478.01 2077.85,2443.01 2132.85,2443.01
GND on Top Layer "NONET_L-01_P-001" (solid, pour order 1): 2132.28,2796.41 2027.28,2796.41 2027.28,2706.41 2077.28,2706.41 2077.28,2741.41 2132.28,2741.41
VCC5 on Top Layer "NONET_L-01_P-001" (solid, remove dead copper, pour order 0): 1565,2975 1565,3375 1755,3375 1755,3660 1635,3660 1635,3470 1530,3470 1465,3425 1465,2975
GND on Layer 1 "GND_L02_P006" (solid, pour order 6): 1355.25,1340.17 ccw(c1485.17,1340.17) 1485.17,1210.25 2225.33,1210.25 ccw(c2225.33,1340.17) 2355.25,1340.17 2355.25,3540.96 ccw(c2225.33,3540.96) 2225.33,3670.88 1485.17,3670.88 ccw(c1485.17,3540.96) 1355.25,3540.96
GND on Bottom Layer "GND_L04_P008" (solid, remove dead copper, pour order 8): 1355.25,1340.17 ccw(c1485.17,1340.17) 1485.17,1210.25 2225.33,1210.25 ccw(c2225.33,1340.17) 2355.25,1340.17 2355.25,3540.96 ccw(c2225.33,3540.96) 2225.33,3670.88 1485.17,3670.88 ccw(c1485.17,3540.96) 1355.25,3540.96
no net on Bottom Solder "NONET_L-01_P-001" (solid): 1795,1810 1905,1700 2015,1810 1905,1920
VCC3_3 on Layer 2 "VCC3_3_L03_P005" (solid, pour order 5): 1355.25,1340.17 ccw(c1485.17,1340.17) 1485.17,1210.25 2225.33,1210.25 ccw(c2225.33,1340.17) 2355.25,1340.17 2355.25,3540.96 ccw(c2225.33,3540.96) 2225.33,3670.88 1485.17,3670.88 ccw(c1485.17,3540.96) 1355.25,3540.96

## Other copper
Multi-Layer:
  pour cut-out: 1315,1125 1315,1405 2440,1405 2440,1125

## Silkscreen, mask and mechanical layers (free items; w line width, h text height)
Bottom Overlay:
  text "heart_beta_poly" at 1545.01,2795 h60 r90
Mechanical 1:
  circle w0.5: c1485.17,1340.17 r49.21
  circle w0.5: c2225.33,1340.17 r49.21
  circle w0.5: c1485.17,3540.96 r49.21
  circle w0.5: c2225.33,3540.96 r49.21
  lines w0.5: 1355.25,1340.17 ccw(c1485.17,1340.17) 1485.17,1210.25 2225.33,1210.25 ccw(c2225.33,1340.17) 2355.25,1340.17 2355.25,3540.96 ccw(c2225.33,3540.96) 2225.33,3670.88 1485.17,3670.88 ccw(c1485.17,3540.96) 1355.25,3540.96 1355.25,1340.17
Mechanical 13:
  lines w10: 1655.54,3565.54 1656.09,3565 2055,3565 2055,3665 2054.89,3665.11 1655.54,3665.11 1655.54,3565.54